# EAGLE board PCB v36 (EAGLE 9.7.0)
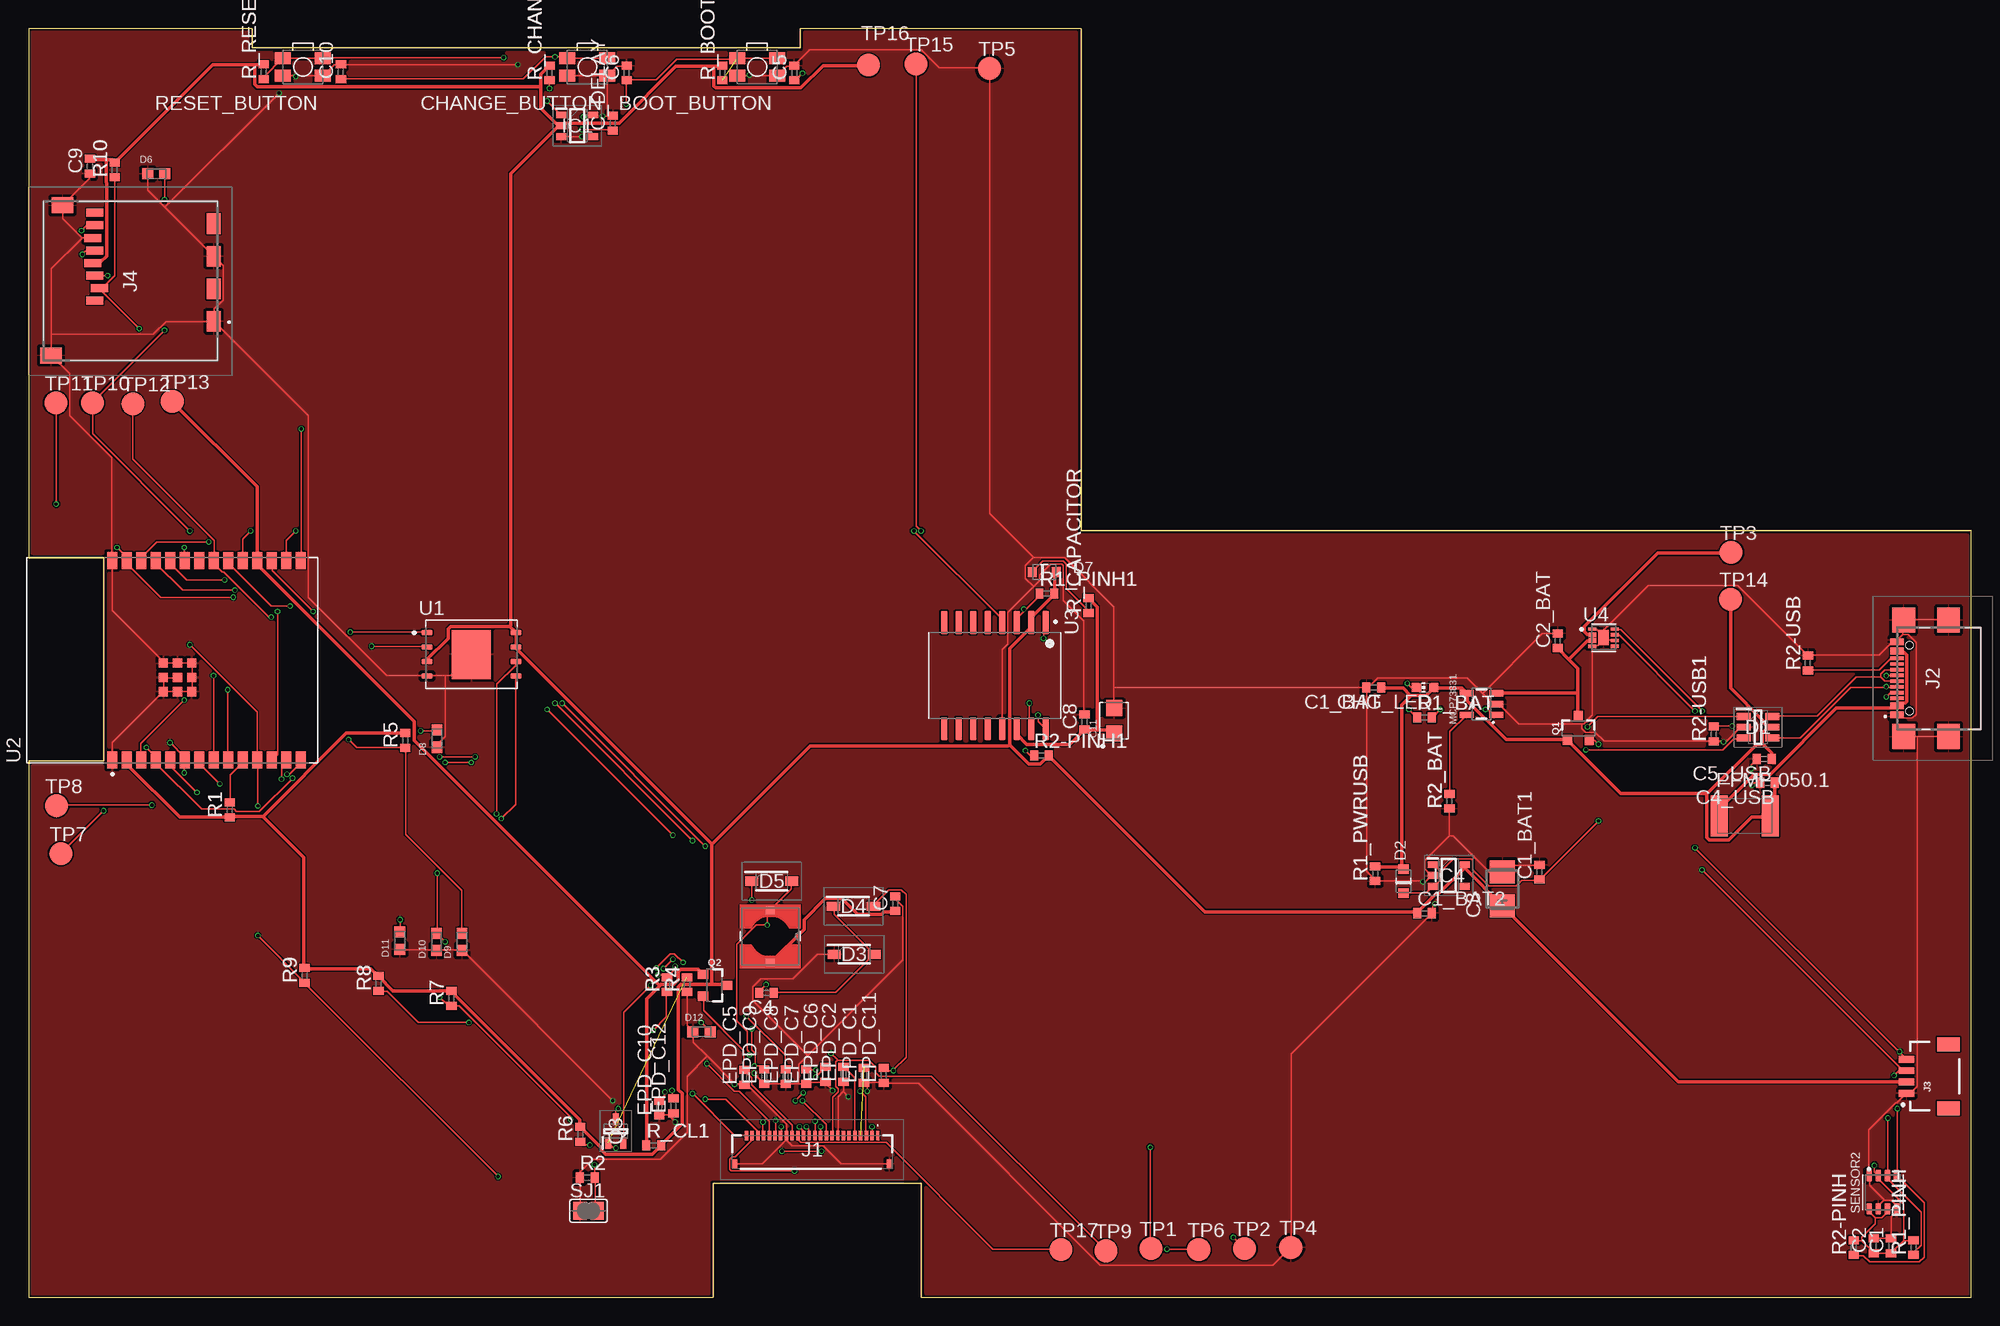
[diagram p0: board, top side]
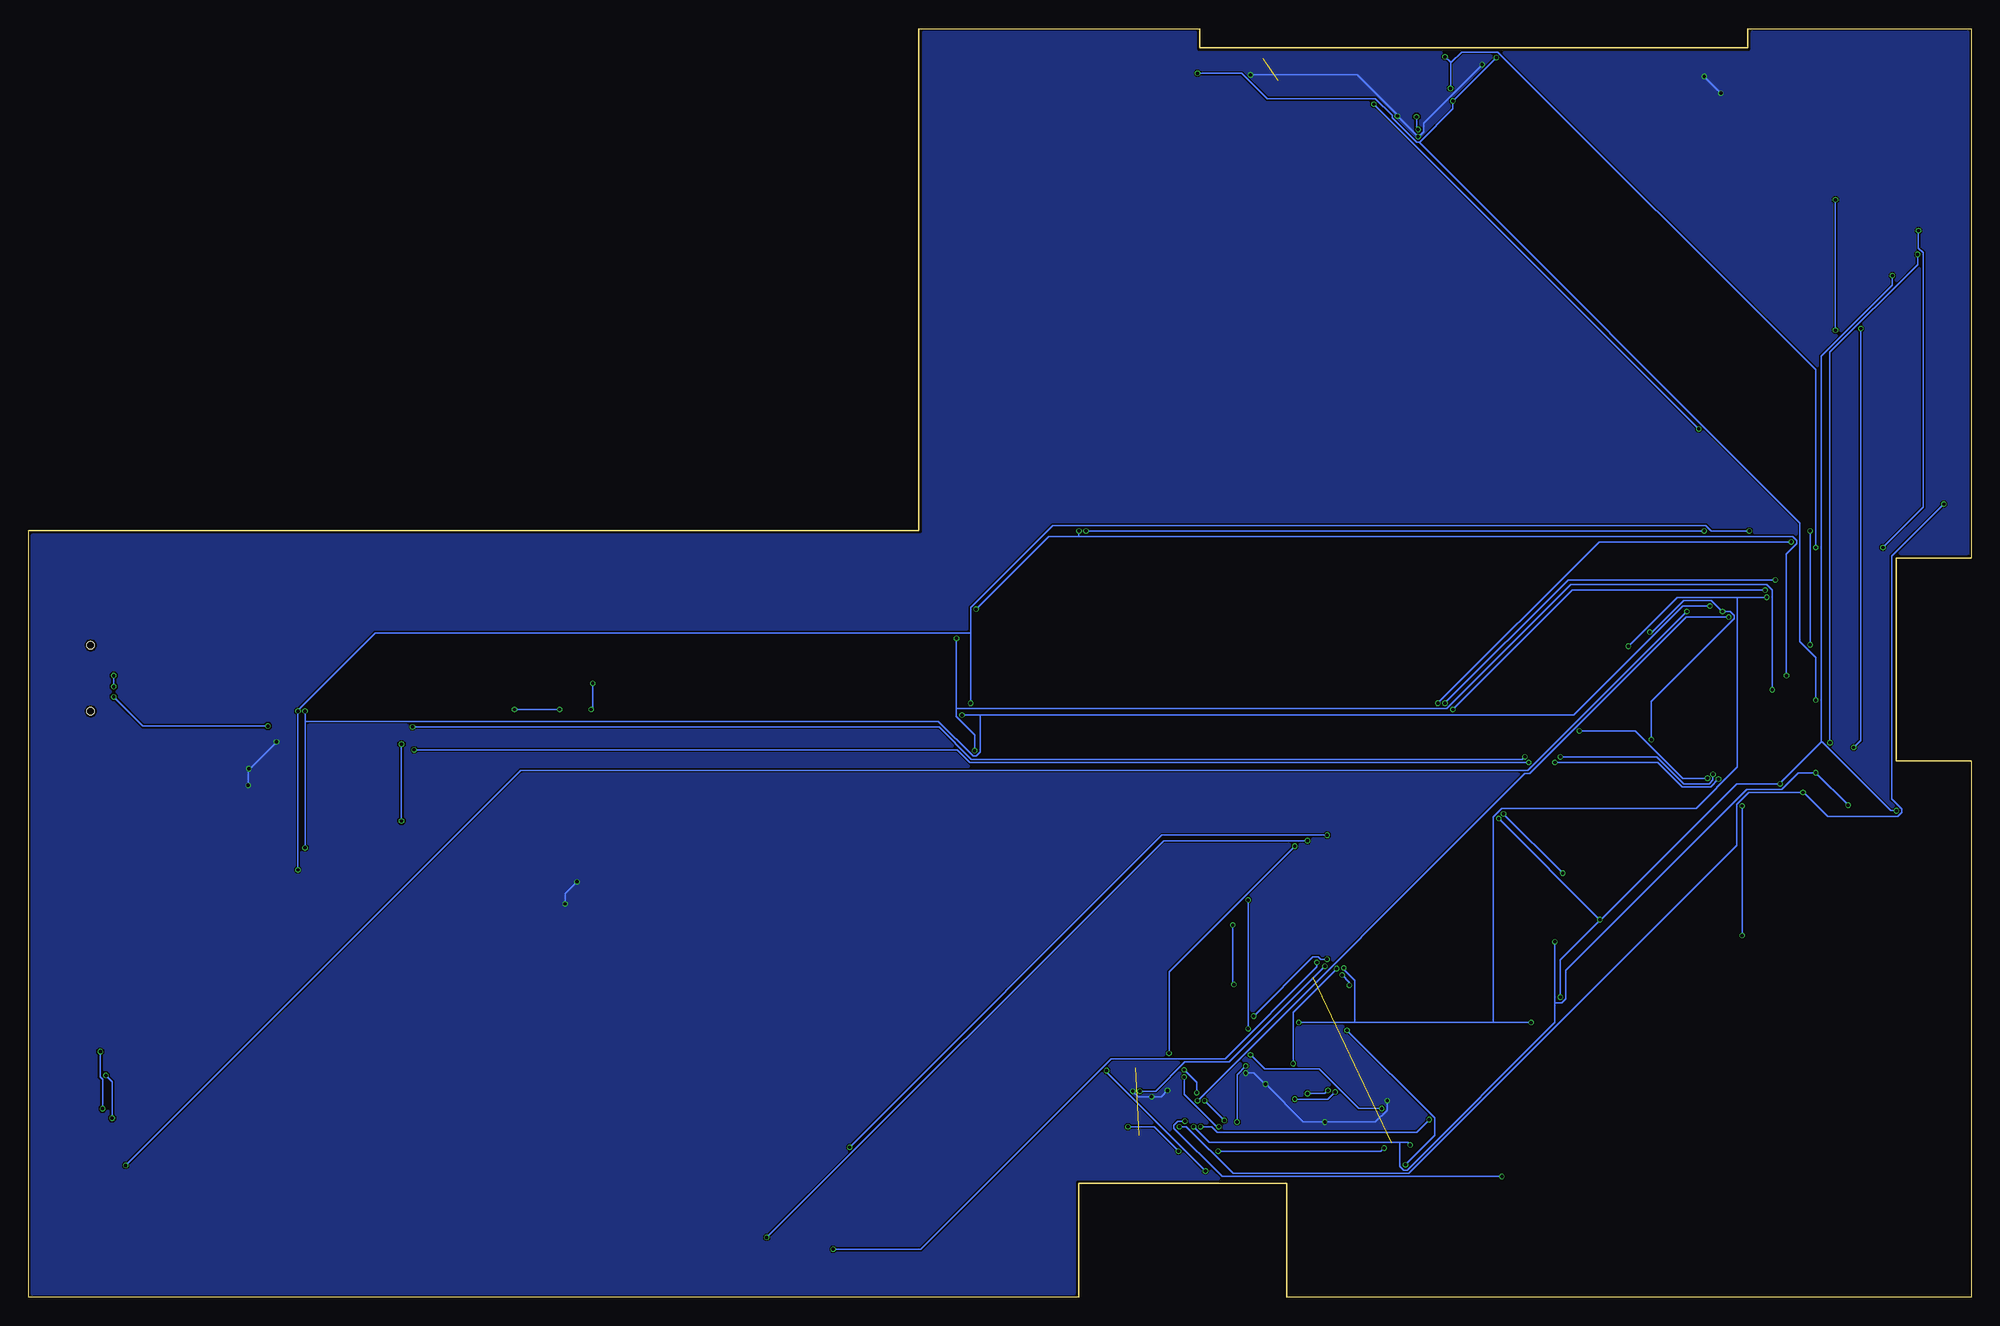
[diagram p1: board, bottom side, seen from below]

Size 170.2 x 111.2 mm. Coordinates in mm from the lower left corner, seen from the top.
Outline: 0,0 60,0 60,10 78.2,10 78.2,0 170.2,0 170.2,67.2 92.2,67.2 92.2,111.2 67.6,111.2 67.6,109.5 19.6,109.5 19.6,111.2 0,111.2 0,64.8 6.6,64.8 6.6,47 0,47 0,0
Copper layers (1*16): Top / Bottom
Stack-up Default Layer Stack: Top User Defined 0.035mm / Dielectric-1 User Defined 1.6mm / Bottom User Defined 0.035mm
Design rules: minimum copper width classes=1 0.3mm, minimum copper width classes=0 0.15mm, minimum copper width 0.15mm, minimum drill size 0.3mm, copper clearance wire_polygon to wire_polygon 5mil, copper clearance wire_polygon to pad_smd 5mil, copper clearance wire_polygon to via 5mil, copper clearance pad_smd to pad_smd 5mil, copper clearance pad_smd to via 5mil, copper clearance via to via 5mil, copper clearance smd to pad (same net) 5mil, copper clearance smd to via (same net) 5mil, copper clearance smd to smd (same net) 5mil, dimension clearance 0.2mm, restrict clearance 0mil, via restrict clearance 0mil, drill distance 6mil, keepout clearance 0mil
Net classes: 0 default: width 0.15 mm; 1 POWER: width 0.3 mm

## Footprints (pad centres in the part's own frame; a part is rotated, then mirrored left to right if it is on the bottom)
MYBUTTON = smd 1.4 x 1.05: 1 1.75,0.75; 2 -1.75,0.75; 3 -1.75,-0.75; 4 1.75,-0.75
EAGLE-LTSPICE_C0402 = smd 0.7 x 0.9: 1 -0.65,0; 2 0.65,0
ESP32_WROVER_EAGLE-LTSPICE_C0402 = smd 0.7 x 0.9: 1 -0.65,0; 2 0.65,0
RCL_CT3528 = smd 2 x 2.2: + -1.5,0; - 1.5,0
CAPCP3225X100N = smd 1.4 x 1.4: 1 -1.1,0; 2 1.1,0
ADAFRUIT_CHIP-LED0603 = smd 0.8 x 0.8: A 0,-0.75; C 0,0.75
SOT95P280X145-6N = smd 1.2 x 0.6: 1 -1.25,0.95; 2 -1.25,0; 3 -1.25,-0.95; 4 1.25,-0.95; 5 1.25,0; 6 1.25,0.95
ESP32_WROVER_AVX---SD0805S020S1R0_AVX_SD0805S020S1R0_0 = smd 0.8 x 0.9: 1 -1.05,0; 2 1.05,0
SOD3716X135N = smd 1.15 x 0.8: 1 -1.75,0; 2 1.75,0
DIOC1608X36N = smd 0.97 x 0.94: 1 -0.75,0; 2 0.75,0
SOT95P280X125-5N = smd 0.9 x 0.6: 1 -1.4,0.95; 2 -1.4,0; 3 -1.4,-0.95; 4 1.4,-0.95; 5 1.4,0.95
SOT95P280X120-5N = smd 0.9 x 0.6: 1 -1.4,0.95; 2 -1.4,0; 3 -1.4,-0.95; 4 1.4,-0.95; 5 1.4,0.95
FH34SRJ24S05SH99 = smd 0.3 x 0.8: 1 5.75,1.45; 2 5.25,1.45; 3 4.75,1.45; 4 4.25,1.45; 5 3.75,1.45; 6 3.25,1.45; 7 2.75,1.45; 8 2.25,1.45; 9 1.75,1.45; 10 1.25,1.45; 11 0.75,1.45; 12 0.25,1.45; 13 -0.25,1.45; 14 -0.75,1.45; 15 -1.25,1.45; 16 -1.75,1.45; 17 -2.25,1.45; 18 -2.75,1.45; 19 -3.25,1.45; 20 -3.75,1.45; 21 -4.25,1.45; 22 -4.75,1.45; 23 -5.25,1.45; 24 -5.75,1.45 | smd 0.4 x 0.8: MP1 6.75,-1.05; MP2 -6.75,-1.05
SAMACSYS_PARTS_USB4110GFA = smd 0.3 x 1.15: A1 -3.35,3.678; A4 -2.55,3.678; A5 -1.25,3.678; A6 -0.25,3.678; A7 0.25,3.678; A8 1.25,3.678; A9 2.55,3.678; A12 3.35,3.678; B1 3.05,3.678; B4 2.25,3.678; B5 1.75,3.678; B6 0.75,3.678; B7 -0.75,3.678; B8 -1.75,3.678; B9 -2.25,3.678; B12 -3.05,3.678 | smd 2.18 x 2: MP1 -5.11,-0.827; MP2 5.11,-0.827; MP3 -5.11,3.103; MP4 5.11,3.103 | hole 0.65: -2.89,2.603; 2.89,2.603
JST04_1MM_RA = smd 0.6 x 1.35: 1 -1.5,0; 2 -0.5,0; 3 0.5,0; 4 1.5,0 | smd 1.2 x 2: NC1 2.8,-3.675; NC2 -2.8,-3.675
112ATAARR03ATTEND = smd 1.8 x 1.2: G1 10.6,10.4; G2 4.9,10.4; S1 7.75,10.4; S2 2.05,10.4 | smd 1.4 x 1.9: G3 13.6,-3.85; G4 0.45,-2.85 | smd 0.7 x 1.5: P1 8.8,0; P2 7.7,0.4; P3 6.6,0; P4 5.5,-0.2; P5 4.4,0; P6 3.3,-0.2; P7 2.2,0; P8 1.1,0
IND_4828-WE-TPC_WRE = smd 0.635 x 0.762: 1 -2.286,0; 2 2.286,0
ESP32_WROVER_SPARKFUN-IC-POWER_SOT23-5 = smd 0.55 x 1.2: 1 -0.95,-1.3; 2 0,-1.3; 3 0.95,-1.3; 4 0.95,1.3; 5 -0.95,1.3
ESP32C6_VARISTOR_CT/CN1812 = smd 1.5 x 3.6: 1 -2.25,0; 2 2.25,0
ESP32_WROVER_SPARKFUN-DISCRETESEMI_SOT23-3 = smd 0.8 x 0.9: 1 -0.95,-1; 2 0.95,-1; 3 0,1.1
SOT65P210X110-3N = smd 1.05 x 0.5: 1 -1.05,0.65; 2 -1.05,-0.65; 3 1.05,0
ESP32_WROVER_EAGLE-LTSPICE_R0402 = smd 0.7 x 0.9: 1 -0.65,0; 2 0.65,0
ESP32_WROVER_BME680_PSON80P300X300X100-8N = smd 1.016 x 0.5: 1 1.458,1.2; 2 1.458,0.4; 3 1.458,-0.4; 4 1.458,-1.2; 5 -1.458,-1.22; 6 -1.458,-0.4; 7 -1.458,0.4; 8 -1.458,1.2
SJ = smd 1.168 x 1.6: 1 -0.762,0; 2 0.762,0
TP20R = smd 2 x 2: TP 0,0
SON127P600X800X80-9N = smd 0.94 x 0.44: 1 -3.895,1.905; 2 -3.895,0.635; 3 -3.895,-0.635; 4 -3.895,-1.905; 5 3.895,-1.905; 6 3.895,-0.635; 7 3.895,0.635; 8 3.895,1.905 | smd 3.4 x 4.3: 9 0,0
XCVR_ESP32-C6-WROOM-1-N8 = smd 1.5 x 0.9: 1 -8.75,5.26; 2 -8.75,3.99; 3 -8.75,2.72; 4 -8.75,1.45; 5 -8.75,0.18; 6 -8.75,-1.09; 7 -8.75,-2.36; 8 -8.75,-3.63; 9 -8.75,-4.9; 10 -8.75,-6.17; 11 -8.75,-7.44; 12 -8.75,-8.71; 13 -8.75,-9.98; 14 -8.75,-11.25; 15 8.75,-11.25; 16 8.75,-9.98; 17 8.75,-8.71; 18 8.75,-7.44; 19 8.75,-6.17; 20 8.75,-4.9; 21 8.75,-3.63; 22 8.75,-2.36; 23 8.75,-1.09; 24 8.75,0.18; 25 8.75,1.45; 26 8.75,2.72; 27 8.75,3.99; 28 8.75,5.26 | smd 0.8 x 0.8: 29_1 -2.755,0.79; 29_2 -1.505,0.79; 29_3 -0.255,0.79; 29_4 -2.755,-0.46; 29_5 -1.505,-0.46; 29_6 -0.255,-0.46; 29_7 -2.755,-1.71; 29_8 -1.505,-1.71; 29_9 -0.255,-1.71
SOIC127P1032X265-16N = smd 2.05 x 0.59: 1 -4.655,4.445; 2 -4.655,3.175; 3 -4.655,1.905; 4 -4.655,0.635; 5 -4.655,-0.635; 6 -4.655,-1.905; 7 -4.655,-3.175; 8 -4.655,-4.445; 9 4.655,-4.445; 10 4.655,-3.175; 11 4.655,-1.905; 12 4.655,-0.635; 13 4.655,0.635; 14 4.655,1.905; 15 4.655,3.175; 16 4.655,4.445
SON50P200X200X80-9N = smd 0.76 x 0.27: 1 -0.985,0.75; 4 -0.985,-0.75; 5 0.985,-0.75; 6 0.985,-0.25; 7 0.985,0.25; 8 0.985,0.75 | smd 0.76 x 0.422: 2 -0.985,0.25; 3 -0.985,-0.25 | smd 0.9 x 1.3: 9 0,0

## Placement (x,y rotation side)
BOOT_BUTTON  BUTTON_CUSYOMV1  [MYBUTTON]  63.83,107.83 180 top
C1  100nF  [EAGLE-LTSPICE_C0402]  163.16,4.53 90 top
C1_BAT  4.7uF  [EAGLE-LTSPICE_C0402]  117.85,53.45 180 top
C1_BAT1  4.7uF  [ESP32_WROVER_EAGLE-LTSPICE_C0402]  132.35,37.27 90 top
C1_BAT2  4.7uF  [ESP32_WROVER_EAGLE-LTSPICE_C0402]  122.29,33.67 0 top
C2  100nF  [EAGLE-LTSPICE_C0402]  161.64,4.53 90 top
C2_BAT  4.7uF  [EAGLE-LTSPICE_C0402]  133.96,57.55 90 top
C3  100uF TANT  [RCL_CT3528]  129.11,35.8 90 top
C4  4.7uF/25V  [EAGLE-LTSPICE_C0402]  64.65,26.69 180 top
C4_USB  100nF  [EAGLE-LTSPICE_C0402]  152.33,45.1 180 top
C5  1uF  [EAGLE-LTSPICE_C0402]  67.08,107.31 90 top
C5_USB  4.7uF  [EAGLE-LTSPICE_C0402]  152.05,47.18 180 top
C6  100nF  [EAGLE-LTSPICE_C0402]  52.41,107.31 90 top
C7  10uF  [EAGLE-LTSPICE_C0402]  75.92,34.51 90 top
C8  100nF  [EAGLE-LTSPICE_C0402]  92.5,50.43 90 top
C9  100nF  [EAGLE-LTSPICE_C0402]  5.38,99.13 90 top
C10  100nF  [EAGLE-LTSPICE_C0402]  27.36,107.41 90 top
C11  CPH3225A  [CAPCP3225X100N]  95.1,50.54 90 top
C_DELAY  100nF  [EAGLE-LTSPICE_C0402]  51.17,102.89 90 top
CHANGE_BUTTON  BUTTON_CUSYOMV1  [MYBUTTON]  48.96,107.83 180 top
CHG_LED  [ADAFRUIT_CHIP-LED0603]  122.34,53.45 90 top
D1  USBLC6-2SC6Y  [SOT95P280X145-6N]  151.5,49.97 0 top
D2  ESP32_WROVER_AVX---SD0805S020S1R0_AVX_SD0805S020S1R0_0_0AVX_SD0805S020S1R0_0_0  [ESP32_WROVER_AVX---SD0805S020S1R0_AVX_SD0805S020S1R0_0]  120.44,36.48 90 top
D3  MBR0530  [SOD3716X135N]  72.33,30.08 0 top
D4  MBR0530  [SOD3716X135N]  72.27,34.28 0 top
D5  MBR0530  [SOD3716X135N]  65.11,36.48 0 top
D6  PGB1010603MR  [DIOC1608X36N]  11.2,98.47 0 top
D7  ESP32_WROVER_AVX---SD0805S020S1R0_AVX_SD0805S020S1R0_0_0AVX_SD0805S020S1R0_0_0  [ESP32_WROVER_AVX---SD0805S020S1R0_AVX_SD0805S020S1R0_0]  88.99,63.58 0 top
D8  PGB1010603MR  [DIOC1608X36N]  35.78,48.97 90 top
D9  PGB1010603MR  [DIOC1608X36N]  37.96,31.17 90 top
D10  PGB1010603MR  [DIOC1608X36N]  35.74,31.17 90 top
D11  PGB1010603MR  [DIOC1608X36N]  32.52,31.27 90 top
D12  PGB1010603MR  [DIOC1608X36N]  58.95,23.28 0 top
EPD_C1  1uF/50V  [EAGLE-LTSPICE_C0402]  73.19,19.45 90 top
EPD_C2  1uF/50V  [EAGLE-LTSPICE_C0402]  71.4,19.55 90 top
EPD_C5  0.1uF/50v  [EAGLE-LTSPICE_C0402]  62.71,19.29 90 top
EPD_C6  1uF/50V  [EAGLE-LTSPICE_C0402]  69.81,19.55 90 top
EPD_C7  1uF/50V  [EAGLE-LTSPICE_C0402]  68.12,19.35 90 top
EPD_C8  1uF/50V  [EAGLE-LTSPICE_C0402]  66.33,19.35 90 top
EPD_C9  1uF/50V  [EAGLE-LTSPICE_C0402]  64.44,19.35 90 top
EPD_C10  1uF/50V  [EAGLE-LTSPICE_C0402]  55.25,16.59 90 top
EPD_C11  1uF/50V  [EAGLE-LTSPICE_C0402]  74.91,19.47 90 top
EPD_C12  1uF/50V  [EAGLE-LTSPICE_C0402]  56.49,16.79 90 top
IC1  BD5229G-TR  [SOT95P280X125-5N]  48.07,102.67 0 top
IC4  XC6220A331MR-G  [SOT95P280X120-5N]  124.41,36.97 0 top
J1  FH34SRJ-24S-0.5SH_99_  [FH34SRJ24S05SH99]  68.64,12.74 0 top
J2  SAMACSYS_PARTS_USB4110-GF-A  [SAMACSYS_PARTS_USB4110GFA]  167.36,54.26 90 top
J3  QWIIC_RIGHT_ANGLE  [JST04_1MM_RA]  164.51,19.38 90 top
J4  112A-TAAR-R03_ATTEND  [112ATAARR03ATTEND]  5.82,96.15 270 top
L1  68uH  [IND_4828-WE-TPC_WRE]  64.98,31.65 270 top
MCP73831  ESP32_WROVER_SPARKFUN-IC-POWER_MCP73831  [ESP32_WROVER_SPARKFUN-IC-POWER_SOT23-5]  127.28,51.99 90 top
PFMF.050.1  ESP32C6_VARISTORCN1812  [ESP32C6_VARISTOR_CT/CN1812]  150.34,42.2 0 top
Q1  20V/4.2A/52mΩ/1.4W  [ESP32_WROVER_SPARKFUN-DISCRETESEMI_SOT23-3]  135.76,49.86 0 top
Q2  20V/4.2A/52mΩ/1.4W  [ESP32_WROVER_SPARKFUN-DISCRETESEMI_SOT23-3]  60.08,27.36 270 top
Q3  SI1308EDL-T1-GE3  [SOT65P210X110-3N]  51.44,14.58 90 top
R1  10k  [ESP32_WROVER_EAGLE-LTSPICE_R0402]  17.62,42.71 90 top
R1_BAT  200  [ESP32_WROVER_EAGLE-LTSPICE_R0402]  122.28,50.83 0 top
R1_PINH  10K  [ESP32_WROVER_EAGLE-LTSPICE_R0402]  165.13,4.37 90 top
R1_PINH1  10K  [ESP32_WROVER_EAGLE-LTSPICE_R0402]  89.21,61.69 0 top
R1_PWRUSB  100K  [ESP32_WROVER_EAGLE-LTSPICE_R0402]  117.96,37.14 90 top
R2  2.2  [ESP32_WROVER_EAGLE-LTSPICE_R0402]  48.94,10.51 0 top
R2-PINH  10K  [ESP32_WROVER_EAGLE-LTSPICE_R0402]  159.89,4.37 90 top
R2-PINH1  10K  [ESP32_WROVER_EAGLE-LTSPICE_R0402]  88.73,47.49 0 top
R2-USB  5k1  [ESP32_WROVER_EAGLE-LTSPICE_R0402]  155.87,55.6 90 top
R2-USB1  5K1  [ESP32_WROVER_EAGLE-LTSPICE_R0402]  147.63,49.37 90 top
R2_BAT  2K  [ESP32_WROVER_EAGLE-LTSPICE_R0402]  124.47,43.49 90 top
R3  0.47  [ESP32_WROVER_EAGLE-LTSPICE_R0402]  55.94,27.41 90 top
R4  10K  [ESP32_WROVER_EAGLE-LTSPICE_R0402]  57.68,27.41 90 top
R5  10K  [ESP32_WROVER_EAGLE-LTSPICE_R0402]  33,48.81 90 top
R6  10K  [ESP32_WROVER_EAGLE-LTSPICE_R0402]  48.32,14.31 90 top
R7  10K  [ESP32_WROVER_EAGLE-LTSPICE_R0402]  37.04,26.21 90 top
R8  10K  [ESP32_WROVER_EAGLE-LTSPICE_R0402]  30.66,27.51 90 top
R9  10K  [ESP32_WROVER_EAGLE-LTSPICE_R0402]  24.18,28.21 90 top
R10  10k  [ESP32_WROVER_EAGLE-LTSPICE_R0402]  7.56,98.81 90 top
R_BOOT  10k  [ESP32_WROVER_EAGLE-LTSPICE_R0402]  60.78,107.31 90 top
R_CAPACITOR  15  [ESP32_WROVER_EAGLE-LTSPICE_R0402]  92.86,60.64 90 top
R_CHANGE  10k  [ESP32_WROVER_EAGLE-LTSPICE_R0402]  45.63,107.31 90 top
R_CL1  10K  [ESP32_WROVER_EAGLE-LTSPICE_R0402]  54.78,13.33 0 top
R_RESET  10k  [ESP32_WROVER_EAGLE-LTSPICE_R0402]  20.6,107.41 90 top
RESET_BUTTON  BUTTON_CUSYOMV1  [MYBUTTON]  24.04,107.83 180 top
SENSOR2  ESP32_WROVER_BME680_BME680  [ESP32_WROVER_BME680_PSON80P300X300X100-8N]  162.44,9.22 90 top
SJ1  [SJ]  49.06,7.59 0 top
TP1  TPTP20R  [TP20R]  98.31,4.29 0 top
TP2  TPTP20R  [TP20R]  106.53,4.29 0 top
TP3  TPTP20R  [TP20R]  149.15,65.29 0 top
TP4  TPTP20R  [TP20R]  110.57,4.39 0 top
TP5  TPTP20R  [TP20R]  84.19,107.71 0 top
TP6  TPTP20R  [TP20R]  102.51,4.19 0 top
TP7  TPTP20R  [TP20R]  2.83,38.89 0 top
TP8  TPTP20R  [TP20R]  2.45,43.09 0 top
TP9  TPTP20R  [TP20R]  94.37,4.09 0 top
TP10  TPTP20R  [TP20R]  5.59,78.41 0 top
TP11  TPTP20R  [TP20R]  2.39,78.39 0 top
TP12  TPTP20R  [TP20R]  9.14,78.31 0 top
TP13  TPTP20R  [TP20R]  12.59,78.51 0 top
TP14  TPTP20R  [TP20R]  149.09,61.19 0 top
TP15  TPTP20R  [TP20R]  77.74,108.09 0 top
TP16  TPTP20R  [TP20R]  73.59,107.99 0 top
TP17  TPTP20R  [TP20R]  90.44,4.19 0 top
U1  W25Q512JVEIQ  [SON127P600X800X80-9N]  38.79,56.36 0 top
U2  ESP32-C6-WROOM-1-N8  [XCVR_ESP32-C6-WROOM-1-N8]  12.59,55.84 90 top
U3  DS3231SN#  [SOIC127P1032X265-16N]  84.65,54.5 270 top
U4  MAX17048G+T10  [SON50P200X200X80-9N]  137.97,57.82 0 top

## Library data of the parts
BOOT_BUTTON CHANGE_BUTTON CHG_LED PFMF.050.1 RESET_BUTTON SJ1 TP1-TP17 = DeskAssistant v19 v1
C1 C1_BAT C1_BAT1 C1_BAT2 C2 C2_BAT C4 C4_USB C5 C5_USB C6-C10 C_DELAY EPD_C1 EPD_C2 EPD_C5-EPD_C12 = DeskAssistant v19 v1; SPICEMODEL: NONE; SPICEPREFIX: C
C3 = DeskAssistant v19 v1; SPICEPREFIX: C
C11 = DeskAssistant v19 v1; AVAILABILITY: Not in stock; CHECK_PRICES: https://www.snapeda.com/parts/CPH3225A/Seiko+Instruments/view-part/?ref=eda; DESCRIPTION: 11 mF (EDLC) Supercapacitor 3.3 V 1210 (3225 Metric) - -; MF: Seiko Instruments; MP: CPH3225A; PACKAGE: 1210 Seiko; PRICE: None; PURCHASE-URL: https://www.snapeda.com/api/url_track_click_mouser/?unipart_id=562593&manufacturer=Seiko Instruments&part_name=CPH3225A&search_term=None; SNAPEDA_LINK: https://www.snapeda.com/parts/CPH3225A/Seiko+Instruments/view-part/?ref=snap
D1 = DeskAssistant v19 v1; AVAILABILITY: In Stock; CHECK_PRICES: https://www.snapeda.com/parts/USBLC6-2SC6Y/STMicroelectronics/view-part/?ref=eda; DESCRIPTION: 17V Clamp 5A (8/20µs) Ipp Tvs Diode Surface Mount SOT-23-6; MF: STMicroelectronics; MP: USBLC6-2SC6Y; PACKAGE: SOT-23-6 STMicroelectronics; PRICE: None; SNAPEDA_LINK: https://www.snapeda.com/parts/USBLC6-2SC6Y/STMicroelectronics/view-part/?ref=snap
D2 D7 = DeskAssistant v19 v1; CENTROID_NOT_SPECIFIED: No; DATASHEET: http://datasheets.avx.com/schottky.pdf; DIGIKEY_DESCRIPTION: DIODE SCHOTTKY 20V 1A 0805; DIGIKEY_PART_NUMBER: 478-7800-1-ND; LEAD_FREE: yes; MF: AVX; MOUSER_PART_NUMBER: 581-SD0805S020S1R0; PACKAGE: 0805 (2012 metric); PREFIX: D; ROHS: yes; TEMPERATURE_RANGE_HIGH: +125°C; TEMPERATURE_RANGE_LOW: -55°C
D3-D5 = DeskAssistant v19 v1; AVAILABILITY: In Stock; CHECK_PRICES: https://www.snapeda.com/parts/MBR0530/Onsemi/view-part/?ref=eda; DESCRIPTION: Diode Schottky 30 V 500mA Surface Mount SOD-123; MF: ON Semiconductor; MP: MBR0530; PACKAGE: SOD-123-2 ON Semiconductor; PRICE: None; PURCHASE-URL: https://www.snapeda.com/api/url_track_click_mouser/?unipart_id=179458&manufacturer=ON Semiconductor&part_name=MBR0530&search_term=None; SNAPEDA_LINK: https://www.snapeda.com/parts/MBR0530/Onsemi/view-part/?ref=snap
D6 D8-D12 = DeskAssistant v19 v1; AVAILABILITY: In Stock; CHECK_PRICES: https://www.snapeda.com/parts/PGB1010603MR/Littelfuse/view-part/?ref=eda; DESCRIPTION: 150V (Typ) Clamp - Ipp Tvs Diode Surface Mount 0603 (1608 Metric); MF: Littelfuse Inc.; MP: PGB1010603MR; PACKAGE: 0603 Littelfuse Inc.; PRICE: None; PURCHASE-URL: https://www.snapeda.com/api/url_track_click_mouser/?unipart_id=5659453&manufacturer=Littelfuse Inc.&part_name=PGB1010603MR&search_term=None; SNAPEDA_LINK: https://www.snapeda.com/parts/PGB1010603MR/Littelfuse/view-part/?ref=snap
IC1 = DeskAssistant v19 v1; DESCRIPTION: Voltage Detector with Adjustable Delay Time: CMOS processes are utilized to develop high precision, low current consumption CMOS reset ICs that allow arbitrary setting of the delay time. The extensive lineup includes both Nch Open Drain and CMOS output types in a wide range of detection voltages (from 2.3V to 6.0V, in 0.1V steps), enabling selection of the ideal solution based on customer requirements. In addition, the entire series is of course both lead-free and RoHS-compliant.; HEIGHT: 1.25mm; MANUFACTURER_NAME: ROHM Semiconductor; MANUFACTURER_PART_NUMBER: BD5229G-TR; MOUSER_PART_NUMBER: 755-BD5229G-TR; MOUSER_PRICE-STOCK: https://www.mouser.co.uk/ProductDetail/ROHM-Semiconductor/BD5229G-TR?qs=4kLU8WoGk0vvnhrrYwdszw%3D%3D
IC4 = DeskAssistant v19 v1; DESCRIPTION: LDO Voltage Regulators; HEIGHT: 1.2mm; MANUFACTURER_NAME: Torex; MANUFACTURER_PART_NUMBER: XC6220A331MR-G; MOUSER_PART_NUMBER: 865-XC6220A331MR-G; MOUSER_PRICE-STOCK: https://www.mouser.co.uk/ProductDetail/Torex-Semiconductor/XC6220A331MR-G?qs=AsjdqWjXhJ8ZSWznL1J0gg%3D%3D
J1 = DeskAssistant v19 v1; DESCRIPTION: 24 Position FFC, FPC Connector Contacts, Top and Bottom 0.020" (0.50mm) Surface Mount, Right Angle; HEIGHT: 1.1mm; MANUFACTURER_NAME: Hirose; MANUFACTURER_PART_NUMBER: FH34SRJ-24S-0.5SH(99); MOUSER_PART_NUMBER: 798-FH34SRJ24S05SH99; MOUSER_PRICE-STOCK: https://www.mouser.co.uk/ProductDetail/Hirose-Connector/FH34SRJ-24S-0.5SH99?qs=vcbW%252B4%252BSTIpKBl5ap9J8Fw%3D%3D
J2 = DeskAssistant v19 v1; DESCRIPTION: CONN USB 2.0 TYPE-C R/A SMT; HEIGHT: 3.26mm; MANUFACTURER_NAME: GCT (GLOBAL CONNECTOR TECHNOLOGY); MANUFACTURER_PART_NUMBER: USB4110-GF-A; MOUSER_PART_NUMBER: 640-USB4110-GF-A; MOUSER_PRICE-STOCK: https://www.mouser.co.uk/ProductDetail/GCT/USB4110-GF-A?qs=KUoIvG%2F9IlYiZvIXQjyJeA%3D%3D
J3 = DeskAssistant v19 v1; PROD_ID: CONN-13694
J4 = DeskAssistant v19 v1; DESCRIPTION: Micro SD Card Socket, Push-Push Type, Top Mount, SMT, H=1.83mm, 10u; HEIGHT: 1.9mm; MANUFACTURER_NAME: ATTEND; MANUFACTURER_PART_NUMBER: 112A-TAAR-R03 ATTEND
L1 = DeskAssistant v19 v1; COPYRIGHT: Copyright (C) 2024 Ultra Librarian. All rights reserved.; MANUFACTURER_PART_NUMBER: 744043680; MFR_NAME: Wurth Electronics
MCP73831 = DeskAssistant v19 v1; PROD_ID: IC-09995
Q1 Q2 = DeskAssistant v19 v1; PROD_ID: TRAN-14388
Q3 = DeskAssistant v19 v1; AVAILABILITY: In Stock; CHECK_PRICES: https://www.snapeda.com/parts/SI1308EDL-T1-GE3/Vishay+Siliconix/view-part/?ref=eda; DESCRIPTION: Si1308EDL-T1-GE3 N-channel MOSFET Transistor, 1.5 A, 30 V, 3-Pin SC-70 | Siliconix / Vishay SI1308EDL-T1-GE3; MF: Vishay Siliconix; MP: SI1308EDL-T1-GE3; PACKAGE: SOT-323 Vishay Semiconductor; PRICE: None; PURCHASE-URL: https://www.snapeda.com/api/url_track_click_mouser/?unipart_id=274603&manufacturer=Vishay Siliconix&part_name=SI1308EDL-T1-GE3&search_term=None; SNAPEDA_LINK: https://www.snapeda.com/parts/SI1308EDL-T1-GE3/Vishay+Siliconix/view-part/?ref=snap
R1 R1_BAT R1_PINH R1_PINH1 R1_PWRUSB R2 R2-PINH R2-PINH1 R2-USB R2_BAT R3-R10 R_BOOT R_CAPACITOR R_CHANGE R_CL1 R_RESET = DeskAssistant v19 v1; SPICEMODEL: NONE; SPICEPREFIX: R
R2-USB1 = DeskAssistant v19 v1; SPICEMODEL: NONE; SPICEPREFIX: R2-USB1
SENSOR2 = DeskAssistant v19 v1; AVAILABILITY: Unavailable; DESCRIPTION: Integrated Environmental Unit; MF: Bosch Sensortec; MP: BME680; PACKAGE: LGA-8 Bosch Tools; PRICE: None
U1 = DeskAssistant v19 v1; AVAILABILITY: In Stock; CHECK_PRICES: https://www.snapeda.com/parts/W25Q512JVEIQ/Winbond+Electronics/view-part/?ref=eda; DESCRIPTION: FLASH - NOR Memory IC 512Mb (64M x 8) SPI - Quad I/O 133 MHz 8-WSON (8x6); MF: Winbond Electronics; MP: W25Q512JVEIQ; PACKAGE: Package; PRICE: None; SNAPEDA_LINK: https://www.snapeda.com/parts/W25Q512JVEIQ/Winbond+Electronics/view-part/?ref=snap
U2 = DeskAssistant v19 v1; AVAILABILITY: In Stock; CHECK_PRICES: https://www.snapeda.com/parts/ESP32-C6-WROOM-1-N8/Espressif+Systems/view-part/?ref=eda; DESCRIPTION: Multiprotocol Modules ESP32-C6 module, Wi-Fi 6 in 2.4 GHz band, Bluetooth 5, Zigbee 3.0 and Thread. ESP34-WROOM Compatible - ENGINEERING SAMPLE; MF: Espressif Systems; MP: ESP32-C6-WROOM-1-N8; PACKAGE: None; PRICE: None; SNAPEDA_LINK: https://www.snapeda.com/parts/ESP32-C6-WROOM-1-N8/Espressif+Systems/view-part/?ref=snap
U3 = DeskAssistant v19 v1; AVAILABILITY: In Stock; CHECK_PRICES: https://www.snapeda.com/parts/DS3231SN%23/Analog+Devices/view-part/?ref=eda; DESCRIPTION: Extremely Accurate I²C-Integrated RTC/TCXO/Crystal; MF: Analog Devices; MP: DS3231SN#; PACKAGE: SOIC-16 Maxim; PRICE: None; PURCHASE-URL: https://www.snapeda.com/api/url_track_click_mouser/?unipart_id=99048&manufacturer=Analog Devices&part_name=DS3231SN#&search_term=None; SNAPEDA_LINK: https://www.snapeda.com/parts/DS3231SN%23/Analog+Devices/view-part/?ref=snap
U4 = DeskAssistant v19 v1; AVAILABILITY: In Stock; CHECK_PRICES: https://www.snapeda.com/parts/MAX17048G+T10/Analog+Devices/view-part/?ref=eda; DESCRIPTION: 3µA 1-Cell/2-Cell Fuel Gauge with ModelGauge; MF: Analog Devices; MP: MAX17048G+T10; PACKAGE: TDFN-8 Maxim; PRICE: None; PURCHASE-URL: https://www.snapeda.com/api/url_track_click_mouser/?unipart_id=329239&manufacturer=Analog Devices&part_name=MAX17048G+T10&search_term=None; SNAPEDA_LINK: https://www.snapeda.com/parts/MAX17048G+T10/Analog+Devices/view-part/?ref=snap

## Nets
3V3 [POWER]: C1_BAT2.1 C3.+ C9.2 D7.2 IC1.2 IC4.5 J3.2 J4.P4 Q2.3 R1.1 R1_PINH1.2 R2-PINH1.2 R5.2 R6.2 R7.2 R8.2 R9.2 R10.2 R_BOOT.2 R_CHANGE.2 R_CL1.2 R_RESET.2 TP16.TP U1.3 U1.7 U1.8 U2.2 U3.2
32KHZ: R2-PINH1.1 U2.9 U3.1
DN: D1.4 J2.A7 J2.B7
DP: D1.6 J2.A6 J2.B6
EDP_3V3 [POWER]: C7.1 L1.2
EPD_3V3: EPD_C5.2 J1.15 J1.16 Q2.2 TP17.TP
EPD_3V3_C [POWER]: Q2.1 R_CL1.1 TP13.TP U2.18
EPD_BUSY: J1.9 TP9.TP U2.26
EPD_CS: D6.2 J1.12 R9.1 TP10.TP U2.11
EPD_DC: J1.11 TP11.TP U2.5
EPD_RST: J1.10 TP12.TP U2.21
FLASH_CS: D9.2 R5.1 U1.1 U2.12
GDR: J1.2 Q3.1 R4.2
GND: BOOT_BUTTON.1 BOOT_BUTTON.2 C1.2 C1_BAT1.2 C1_BAT2.2 C1_BAT.2 C2.2 C2_BAT.2 C3.- C4_USB.2 C5.2 C5_USB.2 C6.2 C7.2 C8.2 C9.1 C10.2 C11.2 C_DELAY.2 CHANGE_BUTTON.1 CHANGE_BUTTON.2 D1.2 D3.1 D6.1 D8.1 D9.1 D10.1 D11.1 D12.1 EPD_C1.1 EPD_C2.1 EPD_C5.1 EPD_C6.1 EPD_C7.1 EPD_C8.1 EPD_C9.1 EPD_C10.1 EPD_C11.1 EPD_C12.1 IC1.3 IC4.2 J1.8 J1.17 J1.MP1 J1.MP2 J2.A1 J2.A12 J2.B1 J2.B12 J2.MP1 J2.MP2 J2.MP3 J2.MP4 J3.1 J4.G1 J4.G2 J4.G3 J4.G4 J4.P6 MCP73831.2 R1_PWRUSB.1 R2-USB1.1 R2-USB.2 R2.1 R2_BAT.1 R4.1 RESET_BUTTON.1 RESET_BUTTON.2 SENSOR2.1 SENSOR2.5 SENSOR2.7 SJ1.1 TP4.TP TP5.TP U1.4 U1.9 U2.1 U2.28 U2.29_1 U2.29_2 U2.29_3 U2.29_4 U2.29_5 U2.29_6 U2.29_7 U2.29_8 U2.29_9 U3.13 U4.1 U4.4 U4.6 U4.9
GPIO8: R1.2 U2.10
I2C_PW: C1.1 C2.1 R1_PINH.2 R2-PINH.2 SENSOR2.2 SENSOR2.6 SENSOR2.8 U2.17
INT_RTC: R1_PINH1.1 TP15.TP U2.8 U3.3
IO/BOOT: BOOT_BUTTON.3 BOOT_BUTTON.4 C6.1 R_BOOT.1 U2.15
IO/CHANGE: C10.1 CHANGE_BUTTON.3 CHANGE_BUTTON.4 R_CHANGE.1 U2.23
MISO: D12.2 J4.P7 R8.1 TP6.TP U1.2 U2.27
MOSI: D11.2 J1.14 J4.P3 R7.1 TP7.TP U1.5 U2.7
N$1: C4.1 D3.2 D4.1
N$2: EPD_C12.2 J1.24
N$3: J2.A5 R2-USB1.2
N$4: J2.B5 R2-USB.1
N$6: C1_BAT1.1 D2.1 IC4.1 IC4.3 Q1.2
N$8: D7.1 R_CAPACITOR.1
N$9: EPD_C10.2 J1.22
N$11: EPD_C8.2 J1.20
N$12: EPD_C7.2 J1.19
N$13: EPD_C6.2 J1.18
N$15: EPD_C2.2 J1.5
N$16: C_DELAY.1 IC1.5
N$17: EPD_C1.2 J1.4
N$18: MCP73831.5 R2_BAT.2
N$20: CHG_LED.C R1_BAT.1
N$21: MCP73831.1 R1_BAT.2
PREVGH: D5.1 EPD_C9.2 J1.21
PREVGL: D4.2 EPD_C11.2 J1.23
RESE: J1.3 Q3.2 R3.2
RESE': R2.2 R3.1 SJ1.2
RESET: C5.1 IC1.1 R_RESET.1 RESET_BUTTON.3 RESET_BUTTON.4 U2.3
RTC_RST: U2.16 U3.4
RX: TP2.TP U2.24
SCK: D10.2 J1.13 J4.P5 R6.1 TP8.TP U1.6 U2.6
SCL: J3.4 R2-PINH.1 SENSOR2.4 U2.20 U3.16 U4.7
SDA: J3.3 R1_PINH.1 SENSOR2.3 U2.19 U3.15 U4.8
SRC: C4.2 D5.2 L1.1 Q3.3
SS_SD: D8.2 J4.P2 R10.1 U2.4
TX: TP1.TP U2.25
USB_D+: D1.1 U2.14
USB_D-: D1.3 U2.13
VBAT [POWER]: C2_BAT.1 MCP73831.3 Q1.3 TP3.TP U4.2 U4.3
VBUS [POWER]: C1_BAT.1 C4_USB.1 C5_USB.1 CHG_LED.A D1.5 D2.2 MCP73831.4 PFMF.050.1.2 Q1.1 R1_PWRUSB.2 TP14.TP
VRTC [POWER]: C8.1 C11.1 R_CAPACITOR.2 U3.14
VUSB [POWER]: J2.A4 J2.A9 J2.B4 J2.B9 PFMF.050.1.1

## Tracks (layer width: path | path; a pad name or v marks a point on that pad's centre or on a via)
3V3
  Top 0.3: 6.79,99.72 7.34,99.72 7.55,99.51 R10.2 7.69,99.58 16.14,108.03 19.8,108.03 | 6.79,99.72 5.4,99.72 C9.2 | 19.8,108.03 20.57,108.03 R_RESET.2 | 6.79,99.72 6.79,97.71 6.86,97.64 6.86,91.27 6.3,90.72 5.68,90.72 J4.P4 | 44.87,106.09 44.87,104.22 46.4,102.7 46.6,102.7 IC1.2 | 44.87,106.09 44.87,107.2 45.57,107.89 R_CHANGE.2 | 60.04,107.89 56.72,107.89 51.73,102.91 47.02,102.91 46.81,102.7 IC1.2 | 60.04,107.89 60.73,107.89 R_BOOT.2 | 60.04,107.89 60.04,106.16 60.18,106.02 67.66,106.02 69.6,107.96 73.54,107.96 TP16.TP | 19.8,108.03 19.8,106.3 20.01,106.09 44.87,106.09 | 125.76,37.6 123.54,35.39 123.33,35.39 121.67,33.73 C1_BAT2.1 121.53,33.8 103.04,33.8 89.47,47.37 R2-PINH1.2 89.33,47.44 88.64,46.75 87.6,46.75 85.94,48.41 | 125.76,37.6 125.76,37.88 IC4.5 | J3.2 164.47,18.91 144.53,18.91 129.15,34.28 C3.+ 129.01,34.42 125.9,37.53 125.76,37.6 | U2.2 8.66,47.02 8.66,46.68 13.23,42.11 17.59,42.11 R1.1 17.73,42.17 20.57,42.17 | 20.57,42.17 27.84,49.45 32.96,49.45 R5.2 | 20.57,42.17 20.64,42.04 24.1,38.57 24.1,28.95 R9.2 24.24,28.81 29.98,28.81 30.54,28.25 R8.2 30.68,28.12 31.92,26.87 36.98,26.87 R7.2 37.12,26.73 48.27,15.58 48.27,15.1 R6.2 48.34,14.96 50.21,13.09 50.21,12.88 50.55,12.54 54.64,12.54 55.4,13.3 R_CL1.2 55.47,13.44 57.27,15.24 57.27,17.87 56.92,18.21 56.92,27.22 57.13,27.42 59.83,27.42 | D7.2 90.03,63.57 89.89,63.43 89.89,61.7 R1_PINH1.2 89.82,61.56 87.88,59.62 87.88,59.28 U3.2 87.81,59.14 87.81,58.72 85.94,56.86 85.94,48.41 | 42.17,58.79 36.98,58.79 36.77,58.59 36.77,57.76 34.9,55.89 34.9,55.75 U1.3 | 42.17,58.79 42.66,58.31 U1.8 42.73,58.17 42.73,57.06 U1.7 42.73,56.86 59.83,39.75
  Top 0.3: 59.83,27.42 61.15,27.42 Q2.3 | 59.83,27.42 59.83,39.75 | 85.94,48.41 85.8,48.34 68.49,48.34 59.97,39.82 59.83,39.75 | IC1.2 46.33,102.56 42.24,98.48 42.24,58.93 42.17,58.79
32KHZ  (via drill 0.3)
  Top 0.15: v87.32,47.92 87.74,47.51 88.02,47.51 R2-PINH1.1 | v88.92,57.76 88.92,59 89.06,59.14 U3.1 | v17.45,53.25 17.45,47.09 U2.9
  Bottom 0.15: v87.32,47.92 87.32,49.31 88.92,50.9 88.92,51.59 | v88.92,57.76 88.92,51.59 | v17.45,53.25 17.45,61.98 17.94,62.47 35.11,62.47 45.98,51.59 88.92,51.59
DN  (via drill 0.3)
  Top 0.15: 162.74,53.46 159.62,53.46 155.19,49.03 152.77,49.03 D1.4 | 162.74,53.46 163.64,53.46 J2.B7 | v162.74,54.5 163.64,54.5 J2.A7 | v162.74,53.53 162.74,53.46
  Bottom 0.15: v162.74,53.53 v162.74,54.5
DP
  Top 0.15: 162.25,54.36 162.6,54.02 163.64,54.02 J2.A6 | 162.25,54.36 162.25,54.64 162.6,54.99 163.64,54.99 J2.B6 | 162.25,54.36 160.11,54.36 156.71,50.97 152.77,50.97 D1.6
EDP_3V3
  Top 0.3: C7.1 75.9,33.8 74.93,33.8 74.72,33.59 72.64,33.59 71.26,34.97 69.8,34.97 67.93,33.1 67.93,32.27 65.03,29.36 L1.2
EPD_3V3
  Top 0.15: Q2.2 59.14,26.39 59.14,25.14 62.67,21.61 62.67,19.95 EPD_C5.2 62.74,19.88 63.36,19.25 63.36,18.63 66.89,15.1 66.89,14.27 J1.16 J1.15 67.45,14.13 67.45,13.78 67.66,13.57 75.14,13.57 84.48,4.23 90.37,4.23 TP17.TP
EPD_3V3_C
  Top 0.3: 55.3,27.32 55.4,27.42 56.51,27.42 56.92,27.84 56.92,28.53 57.13,28.74 58.66,28.74 59.07,28.32 Q2.1 | 55.3,27.32 54.15,26.18 54.15,13.37 R_CL1.1 | TP13.TP 12.6,78.46 20.01,71.05 20.01,64.61 U2.18 20.08,64.47 20.08,64.2 33.79,50.48 33.79,48.82 55.3,27.32
EPD_BUSY  (via drill 0.3)
  Top 0.15: 70.84,20.78 70.7,20.64 70.7,18.49 70.91,18.28 70.91,18.01 70.43,17.52 70.43,14.2 J1.9 | 70.84,20.78 73.61,20.78 74.24,20.15 74.24,19.67 74.51,19.39 79.08,19.39 94.32,4.16 TP9.TP | v15.79,66.2 11.22,66.2 9.9,64.89 9.9,64.61 U2.26 | v59.28,39.54 v46.74,52.08 | v70.29,21.4 70.84,20.85 70.84,20.78
  Bottom 0.15: v15.79,66.2 32.62,66.2 v46.74,52.08 | v59.28,39.54 70.29,28.53 v70.29,21.4
EPD_CS  (via drill 0.3)
  Top 0.15: v11.91,96.19 11.91,98.41 D6.2 | v11.91,84.76 5.61,78.46 TP10.TP 5.61,78.39 5.61,75.69 v14.13,67.17 | v68.9,15.44 68.9,14.2 J1.12 | v41.13,10.6 24.24,27.49 R9.1 24.17,27.63 v20.08,31.72 | v20.08,43.08 20.08,47.02 U2.11 20.01,47.16 20.01,51.32 v14.13,57.2
  Bottom 0.15: v11.91,84.76 v11.91,96.19 | v68.9,15.44 69.53,15.44 69.87,15.1 69.87,14.82 65.65,10.6 v41.13,10.6 | v20.08,31.72 v20.08,43.08 | v14.13,57.2 v14.13,67.17
EPD_DC  (via drill 0.3)
  Top 0.15: v69.39,14.96 J1.11 | v14.75,44.25 12.46,46.54 12.46,47.02 U2.5 | v2.42,69.53 2.42,78.32 TP11.TP
  Bottom 0.15: v69.39,14.96 68.77,14.96 64.68,10.87 49.31,10.87 20.57,39.61 20.57,43.21 19.53,44.25 v14.75,44.25 14.68,44.25 12.6,42.17 6.44,42.17 6.09,42.52 6.09,42.8 6.99,43.7 6.99,64.96 v2.42,69.53
EPD_RST  (via drill 0.3)
  Top 0.15: v67.8,17.24 69.87,15.17 69.87,14.2 J1.10 | v21.26,59.62 21.05,59.62 17.11,63.57 16.97,63.57 16.27,64.27 16.27,64.54 U2.21 16.27,64.61 16.27,66.34 9.14,73.48 9.14,78.25 TP12.TP
  Bottom 0.15: v67.8,17.24 39.13,45.91 38.71,45.91 25,59.62 v21.26,59.62
FLASH_CS  (via drill 0.3)
  Top 0.15: D9.2 37.95,31.93 37.95,35.66 33.03,40.58 33.03,48.13 R5.1 32.96,48.2 28.74,48.2 v28.05,48.89 | v28.18,58.31 34.83,58.31 U1.1 | v21.81,60.11 21.81,47.58 21.33,47.09 U2.12
  Bottom 0.15: v28.18,58.31 27.98,58.31 25.21,61.08 22.78,61.08 v21.81,60.11 21.12,60.11 20.77,59.76 20.77,59.49 28.05,52.22 v28.05,48.89
GDR  (via drill 0.3)  (1 unrouted)
  Top 0.15: v73.89,14.96 J1.2 | v66,12.81 v69.46,12.81 | v51.45,13.09 51.24,13.09 50.83,13.5 Q3.1
  Bottom 0.15: v73.89,14.96 71.61,14.96 v69.46,12.81 | v66,12.81 51.73,12.81 v51.45,13.09
GND  (via drill 0.3)
  Top 0.15: U2.29_1 11.84,53.12 11.84,54.29 U2.29_2 11.91,54.29 13.02,54.29 U2.29_5 | U2.29_1 11.91,53.12 13.02,53.12 U2.29_4 13.09,53.12 14.27,53.12 U2.29_7 14.34,53.12 14.34,54.29 U2.29_8 14.34,54.36 14.34,55.54 U2.29_9 14.27,55.61 13.09,55.61 U2.29_6 13.02,55.61 11.84,55.61 U2.29_3 11.84,55.68 7.34,60.18 7.34,64.54 U2.28 7.27,64.61 7.27,73.61 3.6,77.28 3.6,80.95 2.01,82.55 J4.G3 2.01,82.62 2.01,84.42 | U2.1 7.34,48.61 11.77,53.05 U2.29_1 | C9.1 5.33,98.48 5.33,98.06 J4.G4 2.98,95.64 2.98,94.53 4.64,92.87 | 4.64,92.87 5.61,92.87 J4.P6 | 2.01,84.42 2.01,90.17 4.64,92.8 4.64,92.87 | 36.49,54.5 36.98,54.5 38.78,56.3 U1.9 | 36.49,54.5 34.9,54.5 U1.4 34.83,54.5 31.37,54.5 24.52,61.36 24.52,77.28 16.27,85.53 J4.G1 | 36.49,54.5 36.49,49.17 35.8,48.48 35.8,48.27 D8.1 | 11.95,95.53 16.2,91.27 J4.G2 16.27,91.2 17.04,90.44 17.04,87.39 16.27,86.63 16.27,85.59 J4.G1 | 11.95,95.53 10.46,97.02 10.46,98.41 D6.1 | 2.01,84.42 10.94,84.42 12.05,85.53 16.2,85.53 J4.G1 | 71.36,18.04 71.4,18.07 71.4,18.84 EPD_C2.1 | 71.36,18.04 70.91,17.59 70.91,14.2 J1.8 | v73.47,18.07 73.47,18.77 EPD_C1.1 73.2,18.84 74.86,18.84 EPD_C11.1 74.93,18.77 77.97,18.77 93.9,2.84 109,2.84 110.52,4.36 TP4.TP 110.59,4.43 110.59,21.33 122.92,33.66 C1_BAT2.2 122.99,33.73 122.99,34.28 v123.2,34.49 | 71.36,18.04 v71.81,17.59 | 67.45,18.7 EPD_C8.1 66.27,18.7 64.47,18.7 EPD_C9.1 64.4,18.77 63.57,19.6 v63.57,19.67 | 67.45,18.7 68.07,18.7 EPD_C7.1 68.14,18.77 68.21,18.84 69.8,18.84 EPD_C6.1 69.8,18.77 v70.43,18.14 | 68.25,21.23 67.45,20.43 67.45,18.7 | 68.25,21.23 76.59,29.57 76.59,34.28 75.97,34.9 75.97,35.11 C7.2
  Top 0.15: 68.25,21.23 63.43,26.04 63.43,27.22 64.13,27.91 66.97,27.91 69.11,30.06 70.57,30.06 D3.1 | D11.1 32.55,30.47 35.73,30.47 D10.1 35.8,30.47 37.95,30.47 D9.1 38.02,30.4 v51.18,17.24 | SJ1.1 48.34,7.62 48.34,10.46 R2.1 48.34,10.53 48.34,11.01 49.44,12.12 55.33,12.12 57.69,14.47 57.69,19.39 59.45,21.16 | R4.1 57.69,26.73 57.69,23.82 58.17,23.34 D12.1 58.24,23.27 58.24,22.37 59.45,21.16 | EPD_C10.1 55.26,16 56.3,16 56.44,16.14 EPD_C12.1 56.3,15.93 56.3,15.72 v56.65,15.38 | 66.34,13.78 64.26,11.71 61.91,11.71 J1.MP2 | 66.34,13.78 66.34,14.13 J1.17 66.41,14.27 66.41,15.17 62.95,18.63 62.74,18.63 EPD_C5.1 62.67,18.7 v61.84,18.7 61.84,18.77 59.45,21.16 | J1.MP1 75.34,11.71 71.19,11.71 69.6,13.3 66.89,13.3 66.41,13.78 66.34,13.78 | 63.16,107.06 65.51,107.06 BOOT_BUTTON.2 65.65,107.13 66.41,107.89 67.03,107.89 C5.2 67.1,108.03 68.42,109.35 78.18,109.35 79.78,107.75 84.14,107.75 TP5.TP 84.21,107.69 84.21,68.7 88.02,64.89 88.02,64.82 | 63.16,107.06 62.12,107.06 BOOT_BUTTON.1 | 23.41,107.06 25.76,107.06 RESET_BUTTON.2 25.83,107.06 26.8,108.03 27.35,108.03 C10.2 27.42,108.03 v42.87,108.03 | 23.41,107.06 22.3,107.06 RESET_BUTTON.1 | v48.48,101.73 IC1.3 | 50.69,103.53 51.11,103.53 C_DELAY.2 | 50.69,103.53 v50.28,103.53 | C6.2 52.35,107.89 51.59,107.89 50.76,107.06 CHANGE_BUTTON.2 | CHANGE_BUTTON.1 47.23,107.06 50.69,107.06 CHANGE_BUTTON.2 | 50.69,103.53 50.69,106.99 CHANGE_BUTTON.2 | v63.16,107.13 63.16,107.06 | C2.2 161.7,5.2 163.15,5.2 C1.2 163.15,5.26 163.15,7.06 163.64,7.55 163.64,7.76 SENSOR2.5 163.64,7.83 163.64,8.03 163.15,8.52 162.53,8.52 | 162.53,8.52 162.04,8.03 162.04,7.83 SENSOR2.7
  Top 0.15: 162.53,8.52 162.53,8.59 161.28,9.83 161.28,10.67 SENSOR2.1 161.21,10.73 161.21,14.68 163.57,17.04 163.64,17.04 164.47,17.87 J3.1 164.54,17.94 164.88,17.94 165.44,18.49 165.44,49.17 | J2.A1 163.71,50.97 163.71,51.18 J2.B12 | J2.A1 163.71,50.9 163.71,49.65 164.19,49.17 J2.MP3 164.26,49.17 165.44,49.17 | 165.44,49.17 168.14,49.17 J2.MP1 | 164.19,58.1 164.19,59.35 J2.MP4 164.26,59.42 168.14,59.42 J2.MP2 | 164.19,58.1 163.71,57.62 J2.A12 163.71,57.55 163.71,57.34 J2.B1 163.64,57.27 163.08,57.27 162.11,56.3 155.88,56.3 R2-USB.2 155.81,56.3 149.72,62.4 141.89,62.4 137.74,58.24 U4.9 | 164.19,58.1 164.68,58.1 165.37,57.41 165.37,51.11 165.02,50.76 163.78,50.76 J2.A1 | C1_BAT1.2 132.34,37.88 129.71,37.88 129.15,37.33 C3.- 129.08,37.33 127.91,37.33 124.79,40.44 124.44,40.44 | 122.16,36.5 122.43,36.5 122.85,36.91 122.99,36.91 IC4.2 122.85,36.98 122.3,37.53 122.3,38.3 124.44,40.44 | 122.16,36.5 118,36.5 R1_PWRUSB.1 118,36.56 117.24,37.33 117.24,53.39 C1_BAT.2 | v122.16,36.43 122.16,36.5 | 124.44,40.44 124.44,42.8 R2_BAT.1 | 88.05,62.29 85.8,60.04 85.8,57.27 85.32,56.79 85.32,49.86 U3.13 | 88.05,62.29 88.57,62.81 88.57,63.3 89.54,64.27 90.51,64.27 90.65,64.13 90.65,61.08 92.45,59.28 92.45,51.11 C8.2 | 95.08,53.46 95.08,60.53 90.79,64.82 88.02,64.82 | 95.08,53.46 95.08,51.66 C11.2 | 88.02,64.82 87.32,64.13 87.32,63.02 88.05,62.29 | v150.97,44.88 151.17,45.08 151.66,45.08 C4_USB.2 | v150.9,46.33 150.9,46.68 C5_USB.2 | 148.47,48.75 148.75,48.75 149.93,49.93 150.2,49.93 D1.2 | 148.47,48.75 147.64,48.75 R2-USB1.1 147.57,48.75 138.01,48.75 137.25,49.52 136.42,49.52 136.08,49.86 136.08,50.28
  Top 0.15: v148.47,48.68 148.47,48.75 | U4.9 137.95,57.76 137.95,57.62 137.46,57.13 137.05,57.13 U4.4 136.98,51.04 136.22,50.28 136.08,50.28 | U4.1 137.05,58.52 137.39,58.52 137.95,57.96 137.95,57.83 U4.9 | U4.6 138.92,57.62 138.01,57.62 U4.9 | 127.39,52.94 128.32,52.01 128.53,52.01 MCP73831.2 128.6,51.94 128.87,51.94 130.54,50.28 136.08,50.28 | 127.39,52.94 126.03,54.29 118.21,54.29 117.38,53.46 117.24,53.46 C1_BAT.2 | 127.39,52.94 132.61,58.17 133.93,58.17 C2_BAT.2 | 95.08,53.46 117.17,53.46 C1_BAT.2 | v21.95,105.54 11.95,95.53 | v23.41,106.99 23.41,107.06
  Bottom 0.15: v73.47,18.07 72.99,17.59 v71.81,17.59 70.98,17.59 v70.43,18.14 | v51.18,17.24 51.18,16.41 52.22,15.38 v56.65,15.38 58.52,15.38 v61.84,18.7 61.91,18.7 62.88,19.67 v63.57,19.67 | v42.87,108.03 47.99,102.91 47.99,102.14 48.41,101.73 v48.48,101.73 v50.28,103.53 50.28,103.6 53.81,107.13 v63.16,107.13 | v123.2,34.49 123.2,35.39 v122.16,36.43 | v150.97,44.88 150.97,46.26 v150.9,46.33 150.83,46.33 v148.47,48.68 | v23.41,106.99 v21.95,105.54
  pour Top: -1.7,113.1 93.4,113.1 93.4,68.6 93.5,68.5 173.2,68.5 173.2,-1.9 77.1,-1.9 77.1,9.4 60.8,9.4 60.8,-2 -2.7,-2 -2.7,48 5.1,48 5.2,48.1 5.2,64.1 -1.7,64.1
  pour Bottom: -1.7,113.1 93.4,113.1 93.4,68.5 173.2,68.5 173.2,-1.9 77.1,-1.9 77.1,9.4 60.8,9.4 60.8,-2 -2.7,-2 -2.7,48 5.2,48 5.2,64.1 -1.7,64.1
GPIO8
  Top 0.15: R1.2 17.66,43.42 17.66,45.78 18.7,46.81 18.7,47.02 U2.10
I2C_PW  (via drill 0.3)
  Top 0.15: 161.77,7 161.28,7.48 161.28,7.76 SENSOR2.8 | 161.77,7 162.32,7 162.81,7.48 162.81,7.76 SENSOR2.6 | 160.59,4.99 159.9,4.99 R2-PINH.2 | 160.59,4.99 161.63,3.95 C2.1 161.7,3.88 C1.1 163.22,3.95 164.26,4.99 | 164.26,4.99 165.09,4.99 R1_PINH.2 | 164.26,4.99 164.26,8.17 162.04,10.39 162.04,10.67 SENSOR2.2 161.98,10.73 161.7,11.01 v161.7,11.57 | v24.93,60.11 21.33,63.71 21.33,64.54 U2.17 | 161.77,7 161.77,6.44 160.59,5.26 160.59,4.99
  Bottom 0.15: v24.93,60.11 38.85,46.19 127.07,46.19 v161.7,11.57
INT_RTC  (via drill 0.3)
  Top 0.15: 87.29,60.21 86.56,59.49 86.56,59.21 U3.3 | 87.29,60.21 88.5,61.43 88.5,61.63 R1_PINH1.1 | v16.2,54.5 16.2,47.09 U2.8 | 87.29,60.21 v87.19,60.32 | v78.18,67.17 77.77,67.59 77.77,108.03 TP15.TP
  Bottom 0.15: v16.2,54.5 16.2,65.17 15.3,66.07 15.3,66.34 15.65,66.69 78.18,66.69 | 78.18,66.69 80.81,66.69 v87.19,60.32 | 78.18,66.69 v78.18,67.17
IO/BOOT  (via drill 0.3)  (1 unrouted)
  Top 0.15: BOOT_BUTTON.3 62.12,108.59 BOOT_BUTTON.4 62.05,108.52 56.78,108.52 54.98,106.72 52.42,106.72 C6.1 52.35,106.65 v52.35,104.57 | v23.89,76.11 23.89,64.61 U2.15
  Bottom 0.15: v52.35,104.57 v23.89,76.11
IO/CHANGE  (via drill 0.3)
  Top 0.15: v45.64,105.95 45.64,106.65 R_CHANGE.1 | C10.1 27.42,106.78 43.35,106.78 45.29,108.72 v46.12,108.72 47.02,108.72 47.16,108.59 CHANGE_BUTTON.4 47.23,108.59 50.69,108.59 CHANGE_BUTTON.3 | v13.64,65.72 13.64,64.61 U2.23
  Bottom 0.15: 45.64,108.24 v45.64,105.95 | v46.12,108.72 45.64,108.24 | v13.64,65.72 13.64,81.3 41.48,109.14 44.67,109.14 45.57,108.24 45.64,108.24
MISO  (via drill 0.3)
  Top 0.15: v30.05,57.06 34.83,57.06 U1.2 | v17.94,61.36 11.56,61.36 8.66,64.27 8.66,64.54 U2.27 8.59,64.61 8.59,64.89 v7.76,65.72 | v4.64,93.49 5.05,93.9 5.75,93.9 J4.P7 | v38.57,24.1 34.14,24.1 31.44,26.8 30.68,26.8 R8.1 | v58.93,24.1 59.69,23.34 D12.2 | v99.72,4.23 102.49,4.23 TP6.TP | v57.34,29.36 56.58,30.12 56.23,30.12 v54.98,28.88
  Bottom 0.15: v30.05,57.06 25.76,61.36 20.5,61.36 | v17.94,61.36 20.5,61.36 | v4.64,93.49 4.64,91.97 4.22,91.55 4.22,69.25 v7.76,65.72 | v58.93,24.1 54.02,24.1 | 54.02,24.1 41.9,24.1 | 41.9,24.1 v38.57,24.1 | v99.72,4.23 92.03,4.23 75.34,20.91 65.37,20.91 57.34,28.95 v57.34,29.36 | v54.98,28.88 54.98,28.74 54.02,27.77 54.02,24.1 | 20.5,61.36 20.5,46.47 24.1,42.87 41.13,42.87 41.9,42.11 41.9,24.1
MOSI  (via drill 0.3)
  Top 0.15: v67.52,14.96 67.86,14.61 67.86,14.2 J1.14 | v47.51,15.58 47.51,15.79 37.74,25.55 R7.1 36.98,25.62 36.7,25.62 v36.01,26.32 | v41.41,41.97 42.66,43.21 42.66,54.43 U1.5 | v32.55,33.1 32.55,32.06 D11.2 | v16.76,45.01 14.96,46.81 14.96,47.02 U2.7 | v6.92,89.54 J4.P3 | v6.58,42.66 2.84,38.92 TP7.TP
  Bottom 0.15: v67.52,14.96 66.55,14.96 66.06,14.47 48.61,14.47 v47.51,15.58 | v32.55,33.1 v41.41,41.97 | v32.55,33.1 32.48,33.1 20.57,45.01 v16.76,45.01 16.76,45.08 13.16,48.68 | v6.92,89.54 6.92,88.71 13.16,82.48 13.16,48.68 | v6.58,42.66 7.06,42.66 13.09,48.68 13.16,48.68 | v36.01,26.32 36.01,29.57 32.55,33.03 v32.55,33.1
N$1
  Top 0.15: C4.1 65.3,26.73 70.7,26.73 74.03,30.06 D3.2 74.03,30.12 70.57,33.59 70.57,34.28 D4.1
N$2  (via drill 0.3)
  Top 0.15: v58.17,17.87 61.84,14.2 62.88,14.2 J1.24 | v56.37,18.14 56.37,17.52 56.44,17.45 EPD_C12.2
  Bottom 0.15: v58.17,17.87 56.65,17.87 v56.37,18.14
N$3  (via drill 0.3)
  Top 0.15: v149.23,50.07 147.64,50.07 R2-USB1.2 | v162.74,52.63 163.08,52.98 163.64,52.98 J2.A5
  Bottom 0.15: v149.23,50.07 160.18,50.07 v162.74,52.63
N$4
  Top 0.15: R2-USB.1 155.88,54.99 162.11,54.99 163.08,55.95 163.64,55.95 J2.B5
N$6  (via drill 0.3)
  Top 0.15: D2.1 120.5,35.46 122.43,35.46 122.99,36.01 IC4.3 123.06,36.08 123.2,36.08 123.68,36.56 123.68,37.4 | 123.68,37.4 123.2,37.88 123.06,37.88 IC4.1 | 123.68,37.4 123.75,37.4 124.79,38.44 126.38,38.44 126.52,38.3 126.52,37.47 127.91,36.08 130.33,36.08 130.81,36.56 132.34,36.56 C1_BAT1.1 132.41,36.63 v137.53,41.76 | v137.53,48.48 137.18,48.82 136.77,48.82 Q1.2
  Bottom 0.15: v137.53,41.76 v137.53,48.48
N$8
  Top 0.15: R_CAPACITOR.1 92.8,60.04 92.8,60.25 90.92,62.12 90.92,64.27 90.65,64.54 88.85,64.54 87.95,63.64 D7.1
N$9  (via drill 0.3)
  Top 0.15: v59.28,17.38 61.08,17.38 63.85,14.61 63.85,14.2 J1.22 | v55.75,18.01 55.75,17.73 55.26,17.24 EPD_C10.2
  Bottom 0.15: v59.28,17.38 56.37,17.38 v55.75,18.01
N$11  (via drill 0.3)
  Top 0.15: v59.42,20.5 61.84,18.07 62.26,18.07 64.89,15.44 J1.20 | v56.44,29.64 v55.61,28.81 | v62.88,24.65 66.27,21.26 66.27,20.01 EPD_C8.2
  Bottom 0.15: v59.42,20.5 59.42,25 v55.61,28.81 | v56.44,29.64 56.99,29.64 57.2,29.85 57.69,29.85 v62.88,24.65
N$12  (via drill 0.3)
  Top 0.15: v65.44,15.51 65.44,14.2 J1.19 | v67.86,17.94 v67.17,17.24 | v68.97,19.95 68.14,19.95 EPD_C7.2
  Bottom 0.15: v67.17,17.24 v65.44,15.51 | v67.86,17.94 67.86,18.84 v68.97,19.95
N$13  (via drill 0.3)
  Top 0.15: v65.93,14.96 65.93,14.2 J1.18 | v68.97,19.32 69.8,20.15 EPD_C6.2
  Bottom 0.15: v65.93,14.96 66.13,14.96 68.97,17.8 v68.97,19.32
N$15
  Top 0.15: J1.5 72.37,14.2 72.37,19.25 71.47,20.15 EPD_C2.2
N$16  (via drill 0.3)
  Top 0.15: v48.61,103.46 48.75,103.6 49.44,103.6 IC1.5 | v48.48,102.35 51.04,102.35 51.11,102.28 C_DELAY.1
  Bottom 0.15: v48.61,103.46 48.61,102.49 v48.48,102.35
N$17  (1 unrouted)
N$18
  Top 0.15: R2_BAT.2 124.51,44.18 124.51,49.58 125.97,51.04 MCP73831.5
N$20  (via drill 0.3)
  Top 0.15: v120.77,53.81 121.12,53.46 121.53,53.46 CHG_LED.C | v120.91,51.52 121.6,50.83 R1_BAT.1
  Bottom 0.15: v120.77,53.81 120.77,51.66 v120.91,51.52
N$21  (via drill 0.3)
  Top 0.15: v123.68,51.52 122.99,50.83 R1_BAT.2 | v127.63,51.52 127.83,51.52 128.25,51.11 128.53,51.11 MCP73831.1
  Bottom 0.15: v127.63,51.52 v123.68,51.52
PREVGH  (via drill 0.3)
  Top 0.15: v64.33,15.38 64.33,14.2 J1.21 | EPD_C9.2 64.4,20.01 64.13,20.29 v63.57,20.29 63.64,20.36 63.64,21.4 63.36,21.68 v63.36,23.55 | v63.36,34.83 63.36,36.43 D5.1
  Bottom 0.15: v64.33,15.38 64.33,19.53 v63.57,20.29 | v63.36,23.55 v63.36,34.83
PREVGL  (via drill 0.3)
  Top 0.15: v67.1,11.08 61.56,11.08 61.42,11.22 61.42,12.12 61.63,12.33 61.91,12.33 63.36,13.78 63.36,14.13 J1.23 | EPD_C11.2 74.93,20.08 75.14,19.88 v75.76,19.88 75.76,19.95 76.87,21.05 76.87,35.32 76.45,35.73 75.34,35.73 74.03,34.42 D4.2
  Bottom 0.15: v67.1,11.08 75.76,19.74 v75.76,19.88
RESE  (via drill 0.3)
  Top 0.15: v72.85,18.07 73.34,17.59 73.34,14.2 J1.3 | v56.65,29.02 56.65,28.81 55.95,28.12 R3.2 55.88,28.12 55.75,28.25 v55.12,28.25 | v54.5,27.36 52.15,25 52.15,13.57 Q3.2
  Bottom 0.15: v72.85,18.07 71.47,18.07 68.9,20.64 65.03,20.64 v56.65,29.02 | v54.5,27.36 54.5,27.63 v55.12,28.25
RESE'  (via drill 0.3)
  Top 0.15: SJ1.2 49.79,7.62 49.65,7.76 49.65,10.46 R2.2 49.58,10.53 v49.58,11.63 | v54.71,23.41 55.88,24.59 55.88,26.73 R3.1
  Bottom 0.15: v54.71,23.41 47.02,15.72 47.02,14.2 v49.58,11.63
RESET  (via drill 0.3)
  Top 0.15: R_RESET.1 20.64,106.78 20.64,106.99 22.23,108.59 RESET_BUTTON.4 25.76,108.59 RESET_BUTTON.3 25.83,108.59 25.9,108.65 v41.62,108.65 | v45.43,104.85 46.6,103.67 IC1.1 | v67.8,107.27 67.24,106.72 67.1,106.72 C5.1 | v13.64,52.35 9.83,48.55 9.83,47.09 U2.3
  Bottom 0.15: v41.62,108.65 v45.43,104.85 45.43,104.15 48.34,101.25 | v67.8,107.27 63.92,107.27 61.7,105.05 52.22,105.05 50.76,103.6 50.76,103.39 48.61,101.25 48.34,101.25 | v13.64,52.35 13.64,56.09 15.03,57.48 15.03,67.87 48.34,101.17 48.34,101.25
RTC_RST  (via drill 0.3)
  Top 0.15: v23.41,67.17 22.58,66.34 22.58,64.61 U2.16 | v77.56,67.17 85.25,59.49 85.25,59.21 U3.4
  Bottom 0.15: v77.56,67.17 v23.41,67.17
RX  (via drill 0.3)
  Top 0.15: v17.17,62.88 13.85,62.88 12.46,64.27 12.46,64.54 U2.24 | v58.17,40.03 v46.12,52.08 | v105.54,5.26 106.51,4.29 TP2.TP
  Bottom 0.15: v17.17,62.88 35.32,62.88 v46.12,52.08 | v58.17,40.03 70.77,40.03 v105.54,5.26
SCK  (via drill 0.3)
  Top 0.15: v13.64,45.98 13.64,47.02 U2.6 13.64,47.09 13.64,47.37 v12.4,48.61 | v10.8,43.14 2.49,43.14 TP8.TP | v4.71,91.41 4.99,91.69 5.75,91.69 J4.P5 | v68.14,14.96 68.35,14.75 68.35,14.2 J1.13 | v49.17,13.37 48.61,13.37 R6.1 | v41,42.38 41,53.74 42.66,55.4 42.66,55.68 U1.6 | v35.8,37.19 35.8,31.93 D10.2 35.8,31.86 v36.49,31.16
  Bottom 0.15: v10.8,43.14 v13.64,45.98 15.17,45.98 16.62,44.53 19.67,44.53 35.52,28.67 35.52,26.18 35.87,25.83 36.49,25.83 | v4.71,91.41 4.71,90.51 12.4,82.82 v12.4,48.61 | v68.14,14.96 66.76,13.57 50.07,13.57 | 50.07,13.57 49.38,13.57 v49.17,13.37 | v35.8,37.19 v41,42.38 | 50.07,13.57 50.07,11.5 49.72,11.15 49.44,11.15 36.49,24.1 36.49,25.83 | v36.49,31.16 36.49,25.83
SCL  (via drill 0.3)
  Top 0.15: R2-PINH.1 159.9,3.67 160.73,3.67 161.28,3.12 165.65,3.12 166.06,3.53 166.06,8.31 163.71,10.67 SENSOR2.4 163.71,10.73 v163.71,16.55 | v145.98,51.38 139.33,58.03 138.99,58.03 U4.7 | 163.88,21.5 164.47,20.91 J3.4 | 163.88,21.5 v145.98,39.4 | v163.91,21.54 163.88,21.5 | v22.92,60.59 21.26,60.59 17.52,64.33 17.52,64.54 U2.20 | v88.43,51.04 88.43,50.48 89.06,49.86 U3.16
  Bottom 0.15: v145.98,39.4 145.98,50.48 | 145.98,50.48 v145.98,51.38 | v163.71,16.55 163.71,19.11 163.91,19.32 v163.91,21.54 | v22.92,60.59 25.28,60.59 34.83,51.04 86.84,51.04 | v88.43,51.04 86.84,51.04 | 145.98,50.48 90.51,50.48 87.46,47.44 87.19,47.44 86.84,47.78 86.84,51.04
SDA  (via drill 0.3)
  Top 0.15: R1_PINH.1 165.16,3.74 165.16,3.95 165.78,4.57 165.78,7.48 162.88,10.39 162.88,10.67 SENSOR2.3 162.88,10.73 v162.88,15.72 | v146.6,51.38 139.47,58.52 138.99,58.52 U4.8 | v146.6,37.47 164.12,19.95 164.47,19.95 J3.3 163.98,20.01 v163.43,19.46 | v19.46,67.17 18.77,66.48 18.77,64.61 U2.19 | v87.67,52.08 87.67,50 87.81,49.86 U3.15
  Bottom 0.15: v146.6,37.47 v146.6,51.38 146.6,51.45 139.82,58.24 87.67,58.24 | v162.88,15.72 162.88,18.91 v163.43,19.46 | v19.46,67.17 22.78,67.17 23.27,67.66 80.47,67.66 87.67,60.46 87.67,58.24 | v87.67,52.08 87.67,58.24
SRC  (via drill 0.3)
  Top 0.15: v64.61,27.42 64.06,26.87 64.06,26.73 C4.2 | v51.66,16.55 51.45,16.34 51.45,15.65 Q3.3 | v63.16,21.26 63.16,21.47 62.95,21.68 62.95,23.34 62.05,24.24 62.05,30.96 63.73,32.64 v64.71,32.64 64.71,33.69 64.96,33.93 L1.1 65.03,34 66.83,35.8 66.83,36.43 D5.2
  Bottom 0.15: v64.71,32.64 64.71,27.52 v64.61,27.42 | v51.66,16.55 53.67,16.55 57.13,20.01 61.91,20.01 v63.16,21.26
SS_SD  (via drill 0.3)
  Top 0.15: R10.1 7.55,98.13 7.55,89.54 6.51,88.5 6.23,88.5 J4.P2 6.51,88.43 6.51,88.09 v9.7,84.9 | v34.35,49.65 35.73,49.65 D8.2 | v23.13,45.5 20.22,42.59 18.21,42.59 18,42.8 15.17,42.8 11.15,46.81 11.15,47.02 U2.4 11.15,47.16 11.15,47.37 v10.32,48.2
  Bottom 0.15: v34.35,49.65 29.43,49.65 25.28,45.5 v23.13,45.5 | v9.7,84.9 9.7,48.82 v10.32,48.2
TX  (via drill 0.3)
  Top 0.15: v18.07,61.98 13.5,61.98 11.15,64.33 11.15,64.54 U2.25 | v56.44,40.51 v45.43,51.52 | v98.27,13.16 98.27,4.29 TP1.TP
  Bottom 0.15: v18.07,61.98 34.97,61.98 v45.43,51.52 | v56.44,40.51 70.91,40.51 v98.27,13.16
USB_D+  (via drill 0.3)
  Top 0.15: v136.56,50 137.46,50.9 150.2,50.9 D1.1 | v36.01,47.37 v39.13,47.37 | v22.64,45.84 22.85,45.84 23.82,46.81 23.82,47.02 U2.14
  Bottom 0.15: v136.56,50 90.44,50 87.6,47.16 39.33,47.16 v39.13,47.37 | v36.01,47.37 27.56,47.37 25.21,45.01 22.99,45.01 22.64,45.36 v22.64,45.84
USB_D-  (via drill 0.3)
  Top 0.15: v136.42,47.99 148.4,47.99 149.37,48.96 150.2,48.96 D1.3 | v36.49,46.88 v38.78,46.88 | v22.16,45.43 22.16,46.68 22.51,47.02 U2.13
  Bottom 0.15: v136.42,47.99 88.85,47.99 87.74,46.88 v38.78,46.88 | v36.49,46.88 27.49,46.88 25.35,44.74 22.85,44.74 v22.16,45.43
VBAT
  Top 0.3: 135.73,52.98 135.73,55.12 134.93,55.92 | 135.73,52.98 135.73,50.97 Q1.3 | 134.93,55.92 134,56.86 C2_BAT.1 | 134.93,55.92 136.56,57.55 136.84,57.55 U4.3 136.98,57.62 136.98,58.03 U4.2 136.84,58.1 136.56,58.1 136.28,58.38 136.28,58.79 142.72,65.23 149.09,65.23 TP3.TP | 135.73,52.98 128.6,52.98 MCP73831.3
VBUS
  Top 0.3: C4_USB.1 152.97,45.08 152.97,42.59 152.63,42.24 PFMF.050.1.2 152.49,42.11 150.97,42.11 148.96,40.1 147.23,40.1 147.02,40.3 147.02,44.11 | 151.87,48.55 152.7,47.72 152.7,47.23 C5_USB.1 | 151.87,48.55 151.87,49.45 152.35,49.93 152.7,49.93 D1.5 152.28,50.07 151.87,50.48 151.87,50.62 149.09,53.39 149.09,61.15 TP14.TP | 147.02,44.11 151.38,48.48 151.73,48.48 151.87,48.55 | R1_PWRUSB.2 118,37.74 120.22,37.74 120.43,37.53 D2.2 120.29,37.88 120.29,51.94 120.98,52.63 121.05,52.77 | 121.05,52.77 120.43,53.39 118.56,53.39 C1_BAT.1 | 121.05,52.77 122.43,52.77 122.99,53.32 CHG_LED.A 123.13,53.39 125.55,53.39 125.97,52.98 MCP73831.4 126.03,52.84 126.03,52.28 129.43,48.89 134.76,48.89 Q1.1 134.9,48.75 139.47,44.18 146.88,44.18 147.02,44.11
VRTC
  Top 0.3: 93.63,49.72 94.8,49.72 95.08,49.45 C11.1 | 93.63,49.72 92.52,49.72 C8.1 92.38,49.65 91.2,48.48 87.46,48.48 86.56,49.38 86.56,49.79 U3.14 | 93.63,49.72 93.63,60.53 R_CAPACITOR.2
VUSB
  Top 0.3: J2.A9 163.71,56.79 163.71,56.58 J2.B4 163.84,56.51 164.33,56.51 164.54,56.3 164.54,52.22 164.4,52.08 163.84,52.08 J2.B9 163.71,52.01 163.71,51.73 J2.A4 163.57,51.66 158.38,51.66 152.56,45.84 151.17,45.84 148.13,42.8 148.13,42.24 PFMF.050.1.1